# Altium PCB ASP LEDBoard.PcbDoc
Units mm, origin at the board's own origin, x right, y up, seen from the top; angles counter-clockwise.
Board outline 80 x 35 mm, 2 copper layers (Top Layer, Bottom Layer); 63 components, 34 nets, 190 pads, 13 vias.
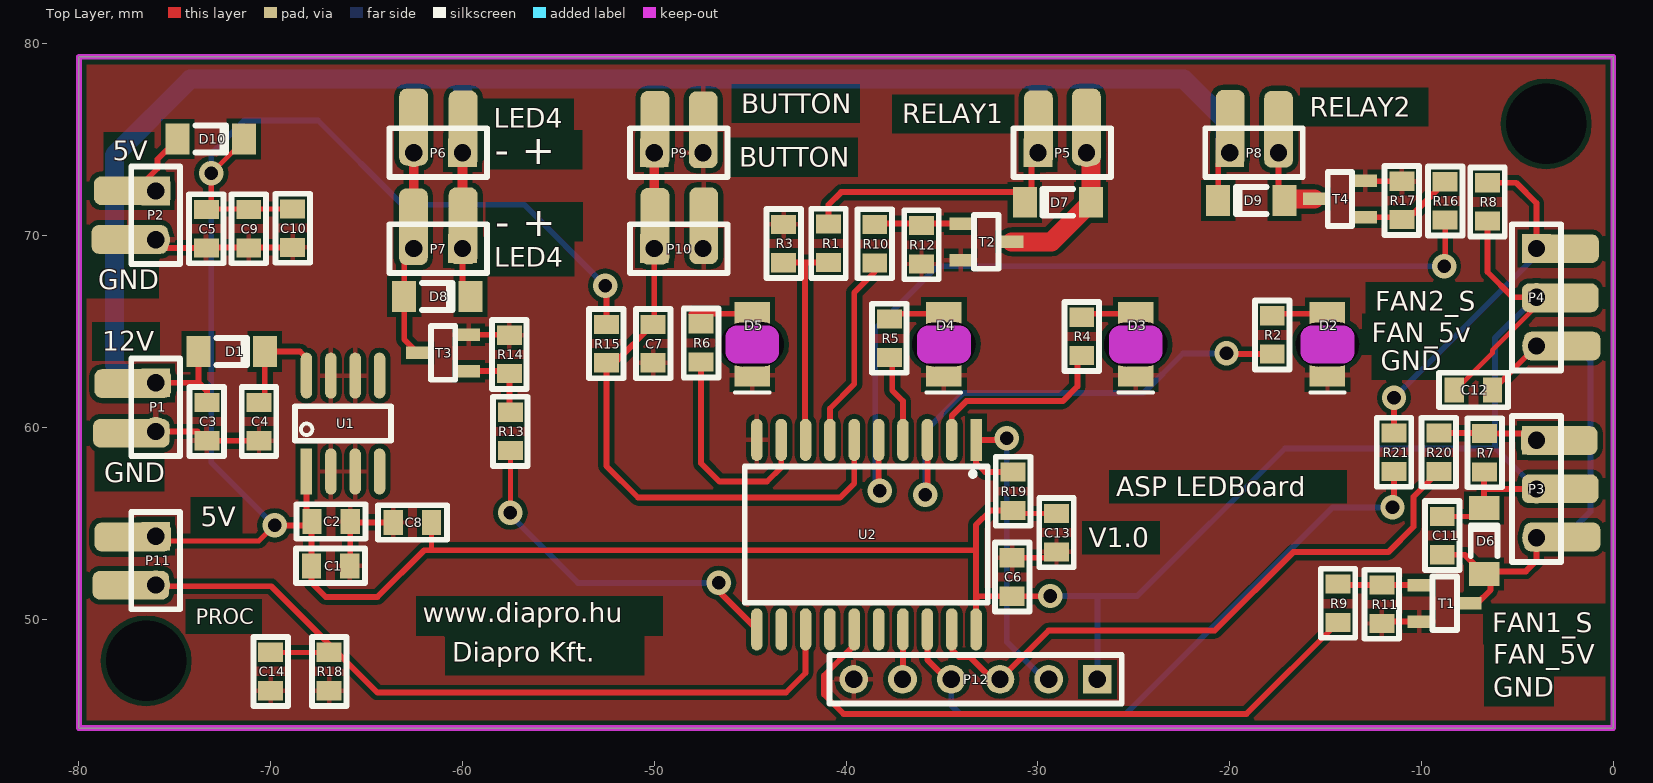
[diagram p0: Top Layer view]
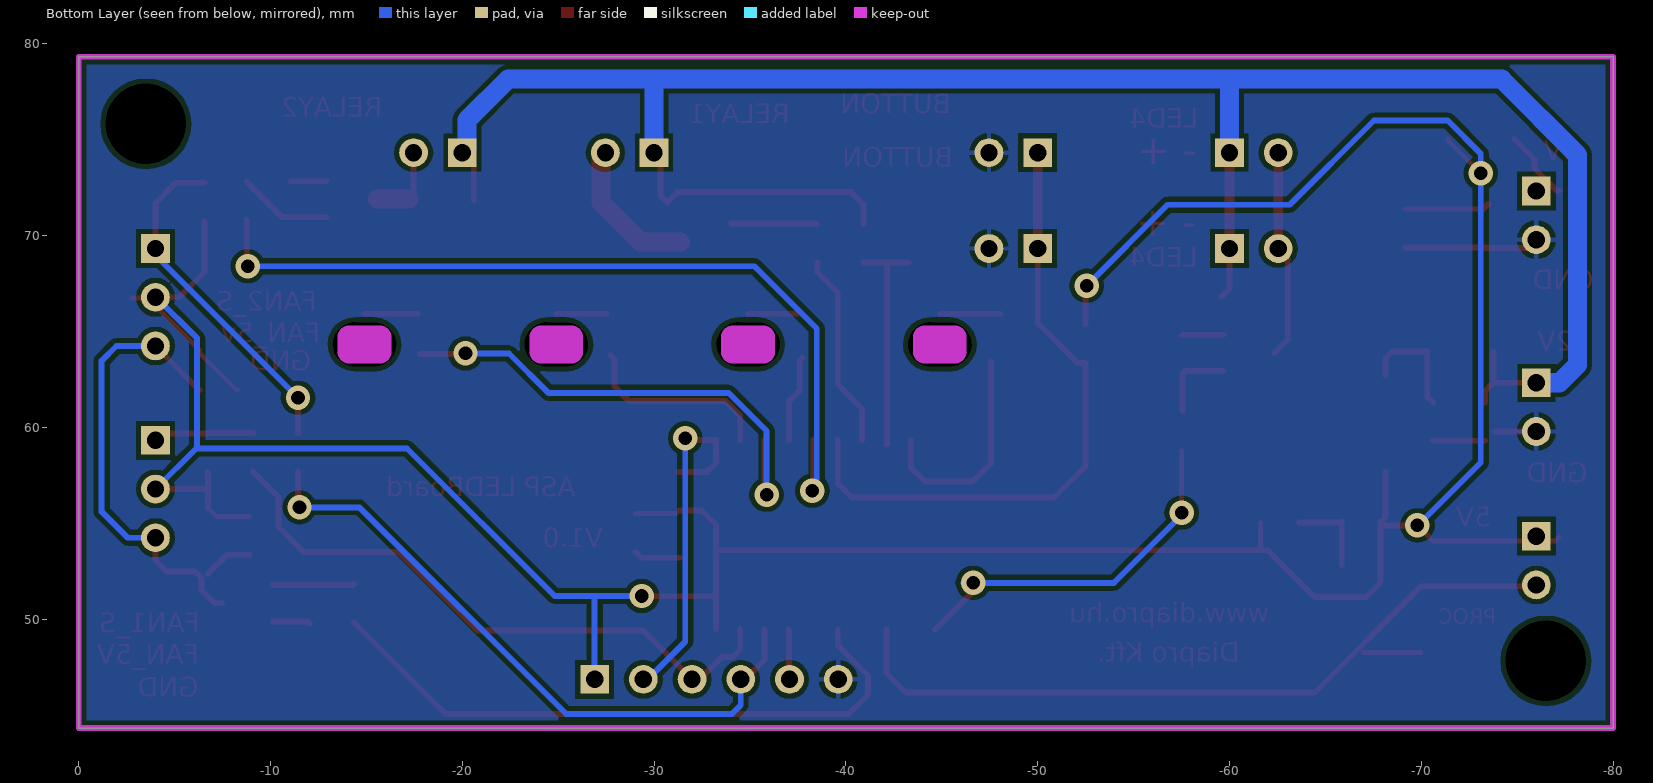
[diagram p1: Bottom Layer view, seen from below]
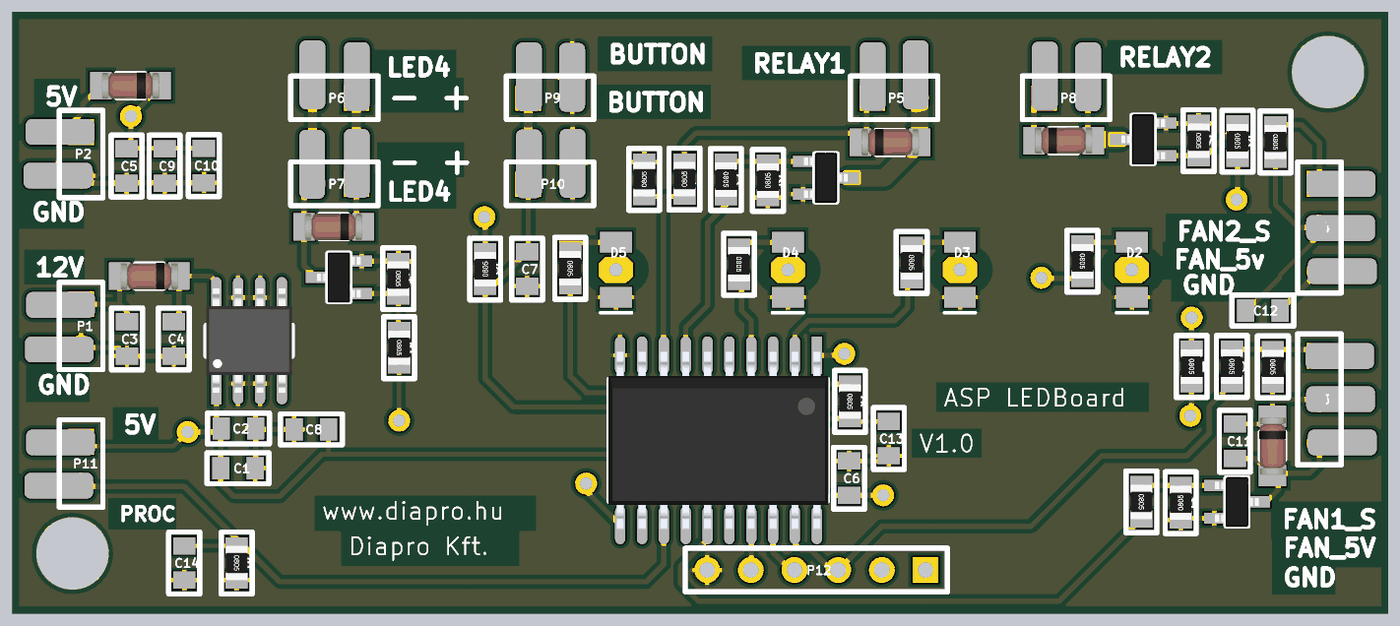
[diagram p2: 3D render of the assembled board from above, using the file's embedded part models]

## Layer stack, top to bottom
Top Layer: signal copper 0.0356
Dielectric: dielectric 0.32, FR-4, Dk 4.8
Bottom Layer: signal copper 0.0356

## Board outline
-80,44.323 -80,79.323 0,79.323 0,44.323

## Design rules (kind name [scope] priority, off if disabled: settings)
Clearance [All] p1: gap=0.254
PolygonConnect [All] p1: connectstyle=Relief reliefconductorwidth=0.254 reliefentries=4 polygonreliefangle="90 Angle"
RoutingVias [All] p1: holewidth=0.711 width=1.27 viastyle="Through Hole" minholewidth=0.711 minwidth=1.27 maxholewidth=0.711 maxwidth=1.27
SilkscreenOverComponentPads [All] p1: minsilkscreentomaskgap=0.254
SolderMaskExpansion [All] p1: expansion=0.102
Width [All] p1: maxlimit=1.524 minlimit=0.254 preferedwidth=0.254
27 further rules are at their usual default settings.

## Components (designator, comment, footprint, x,y, rotation, side; value= is the part's Value field where it differs from the comment)
C1 "10uF" FP_0805_CAP_085 -66.878,52.781 r180 top
C2 "10uF" FP_0805_CAP_085 -66.853,55.093 r180 top
C3 "10uF" FP_0805_CAP_085 -73.33,60.3 r90 top
C4 "10uF" FP_0805_CAP_085 -70.612,60.3 r90 top
C5 "10uF" FP_0805_CAP_085 -73.355,70.358 r90 top
C6 "100nF" FP_0805_CAP_085 -31.344,52.197 r270 top
C7 "100nF" FP_0805_CAP_085 -50.063,64.364 r90 top
C8 "22uF" FP_0805_CAP_085 -62.611,55.042 r0 top
C9 "22uF" FP_0805_CAP_085 -71.145,70.358 r90 top
C10 "22uF" FP_0805_CAP_085 -68.859,70.383 r90 top
C11 "22uF" FP_0805_CAP_085 -8.915,54.356 r90 top
C12 "22uF" FP_0805_CAP_085 -7.29,61.951 r180 top
C13 "22uF" FP_0805_CAP_085 -29.032,54.508 r90 top
C14 "100nF" FP_0805_CAP_085 -70.002,47.269 r90 top
D1 "LL4150GS18" SOD-80 -72.161,63.957 r270 top
D2 "LED_RED" "1206 LED Reversed" -14.9,64.323 r90 top
D3 "LED_RED" "1206 LED Reversed" -24.9,64.323 r90 top
D4 "LED_RED" "1206 LED Reversed" -34.9,64.323 r90 top
D5 "LED_RED" "1206 LED Reversed" -44.9,64.323 r90 top
D6 "LL4150GS18" SOD-80 -6.731,53.95 r0 top
D7 "LL4150GS18" SOD-80 -28.829,71.73 r90 top
D8 "LL4150GS18" SOD-80 -61.443,66.827 r270 top
D9 "LL4150GS18" SOD-80 -18.745,71.831 r90 top
D10 "LL4150GS18" SOD-80 -73.254,75.032 r270 top
P1 "12V" HDR1X2 -76,62.323 r270 top
P2 "5V" HDR1X2 -76,72.323 r270 top
P3 "FAN2" HDR1X3 -4,59.323 r270 top
P4 "FAN1" HDR1X3 -4,69.323 r270 top
P5 "RELAY1" HDR1X2 -30,74.323 r0 top
P6 "LED4" HDR1X2 -60,74.323 r180 top
P7 "EXT_LED" HDR1X2 -60,69.323 r180 top
P8 "RELAY2" HDR1X2 -20,74.323 r0 top
P9 "BUTTON" HDR1X2 -50,74.323 r0 top
P10 "EXT_BUTTON" HDR1X2 -50,69.323 r0 top
P11 "PROC" HDR1X2 -76,54.323 r270 top
P12 "ISP" HDR1X6 -26.899,46.863 r180 top
R1 "8K2" FP_0805_RES -40.919,69.596 r90 top
R2 "470R" FP_0805_RES -17.78,64.821 r270 top
R3 "4K7" FP_0805_RES -43.256,69.583 r90 top
R4 "470R" FP_0805_RES -27.711,64.745 r270 top
R5 "470R" FP_0805_RES -37.744,64.643 r270 top
R6 "470R" FP_0805_RES -47.561,64.402 r270 top
R7 "1K" FP_0805_RES -6.706,58.674 r270 top
R8 "1K" FP_0805_RES -6.553,71.755 r270 top
R9 "470R" FP_0805_RES -14.351,50.825 r270 top
R10 "470R" FP_0805_RES -38.506,69.571 r270 top
R11 "10K" FP_0805_RES -12.065,50.775 r90 top
R12 "10K" FP_0805_RES -36.068,69.52 r90 top
R13 "470R" FP_0805_RES -57.506,59.792 r270 top
R14 "10K" FP_0805_RES -57.556,63.805 r270 top
R15 "1K" FP_0805_RES -52.502,64.364 r90 top
R16 "470R" FP_0805_RES -8.763,71.806 r270 top
R17 "10K" FP_0805_RES -11.024,71.831 r270 top
R18 "1K" FP_0805_RES -66.954,47.269 r270 top
R19 "10K" FP_0805_RES -31.293,56.667 r270 top
R20 "1K" FP_0805_RES -9.093,58.699 r270 top
R21 "1K" FP_0805_RES -11.43,58.699 r270 top
T1 "Si2306" FET_SOT23 -8.788,50.825 r180 top
T2 "Si2306" FET_SOT23 -32.69,69.672 r180 top
T3 "Si2306" FET_SOT23 -61.011,63.881 r0 top
T4 "Si2306" FET_SOT23 -14.249,71.907 r0 top
U1 "78L05" Supply_SOIC8 -66.23,60.198 r90 top
U2 "ATTiny2313" DIGITAL_SOIC20W -38.938,54.407 r0 top

## Footprints (in the part's own frame and the unit in brackets; to place one, negate y for a bottom-side part, rotate by r counter-clockwise, add the part's x,y. Pads: shape width x height; smd on the part's side, far side on the other; paste and mask are expansions set on the pad)
"1206 LED Reversed" [mm] "1206 Green LED"
  oct 1.524x2 hole 2.3 slot 3.3 at 90.7 deg unplated: 0(0,0)
  rect 1.2x1.85 smd: A(1.6,0) K(-1.6,0)
  Keep-Out Layer lines w1.2: -0.4,0.8 -0.4,-0.8 0.4,-0.8 0.4,0.8 -0.4,0.8
  silkscreen extent -2.5,-0.9 -2.5,0.9, body extent -1.6,-0.8 1.6,0.8, height 0.5
DIGITAL_SOIC20W [mm]
  rect 0.6x2.2 smd: 1(5.715,4.94)
  oval 0.6x2.2 smd: 2(4.445,4.94) 3(3.175,4.94) 4(1.905,4.94) 5(0.635,4.94) 6(-0.635,4.94) 7(-1.905,4.94) 8(-3.175,4.94) 9(-4.445,4.94) 10(-5.715,4.94) 11(-5.715,-4.94) 12(-4.445,-4.94) 13(-3.175,-4.94) 14(-1.905,-4.94) 15(-0.635,-4.94) 16(0.635,-4.94) 17(1.905,-4.94) 18(3.175,-4.94) 19(4.445,-4.94) 20(5.715,-4.94)
  silkscreen extent -6.35,-3.56 6.32,3.56, body extent -6.4,-5.15 6.4,5.15, height 2.7
FET_SOT23 [mm] "SOT23-3 tok"
  rect 1.2x0.65 smd: D(-1.327,0) G(1.327,-0.95) S(1.327,0.95)
  silkscreen extent -0.64,-1.4 0.64,1.4, body extent -1.27,-1.46 1.27,1.46, height 0.97
FP_0805_CAP_085 [mm] "0805 kapacitás YAGEO 0.85mm magas"
  rect 1x1.3 smd: 1(-1,0) 2(1,0)
  silkscreen extent -1.8,-0.9 1.8,0.9, body extent -1,-0.64 1.03,0.64, height 0.85
FP_0805_RES [mm] "0805 ellenállás"
  rect 1x1.3 smd: 1(-1,0) 2(1,0)
  silkscreen extent -1.8,-0.9 1.8,0.9, body extent -1,-0.62 1,0.63, height 0.62
HDR1X2 [mm] "Connector; Header; 2 Position"
  rect 1.5x1.5 hole 0.9: 1(0,0)
  round 1.5 hole 0.9: 2(2.54,0)
  silkscreen extent -1.27,-1.27 3.81,1.27
HDR1X3 [mm] "Connector; Header; 3 Position"
  rect 1.5x1.5 hole 0.9: 1(0,0)
  round 1.5 hole 0.9: 2(2.54,0) 3(5.08,0)
  silkscreen extent -1.27,-1.27 6.35,1.27
HDR1X6 [mm] "Connector; Header; 6 Position"
  rect 1.5x1.5 hole 0.9: 1(0,0)
  round 1.5 hole 0.9: 2(2.54,0) 3(5.08,0) 4(7.62,0) 5(10.16,0) 6(12.7,0)
  silkscreen extent -1.27,-1.27 13.97,1.27
SOD-80 [mm]
  rect 1.6x1.25 smd: A(0,-1.598) K(0,1.852)
  silkscreen extent -0.7,-0.67 0.7,0.93, body extent -0.76,-1.55 0.78,1.8
Supply_SOIC8 [mm]
  rect 2.4x0.6 smd: 1(-2.5,1.905)
  oval 2.4x0.6 smd: 2(-2.5,0.635) 3(-2.5,-0.635) 4(-2.5,-1.905) 5(2.5,-1.905) 6(2.5,-0.635) 7(2.5,0.635) 8(2.5,1.905)
  silkscreen extent -0.9,-2.5 0.9,2.5, body extent -3.03,-2.5 3.03,2.5, height 1.9

## Part data
C1 C2 C3 C4 C5 C6 C7 C8 C9 C10 C11 C12 C13 C14: library part CAP, "Capacitor"
D1 D6 D7 D8 D9 D10: library part DIODE_big
D2 D3 D4 D5: library part LED_R, "Typical LED"
P1 P2 P5 P6 P7 P8 P9 P10 P11: library part "Header 2", "Header, 2-Pin"
P3 P4: library part "Header 3", "Header, 3-Pin"
P12: library part "Header 6", "Header, 6-Pin"
R1 R2 R3 R4 R5 R6 R7 R8 R9 R10 R11 R12 R13 R14 R15 R16 R17 R18 R19 R20 R21: library part RES, "Resistor"
T1 T2 T3 T4: library part NMOS
U1: library part 78Lxx_SOIC

## Free pads (board coordinates)
  rrect50% 4x1.5 smd: 0(-77.343,69.799) 0(-77.292,51.765) 0(-77.267,59.69) 0(-77.216,72.339) 0(-77.191,54.28) 0(-77.191,62.281) 0(-2.819,59.309) 0(-2.769,56.794) 0(-2.769,66.751) 0(-2.743,69.317) 0(-2.667,54.28) 0(-2.667,64.237)
  round 1.524 hole 4.2: 0(-76.5,47.823) 0(-3.5,75.823)
  rrect50% 1.5x4 smd: 0(-62.56,70.46) 0(-62.55,75.657) 0(-59.969,70.51) 0(-59.969,75.565) 0(-49.962,70.485) 0(-49.962,75.54) 0(-47.447,75.514) 0(-47.422,70.51) 0(-29.972,75.565) 0(-27.47,75.657) 0(-19.964,75.59) 0(-17.45,75.54)

## Via types
v1: diameter 1.27, hole 0.711, Top Layer to Bottom Layer, 13 vias

## Nets (pads, with @x,y where several pads share a name; then routed paths per layer and width w, separated by ;. In a path a pad name is that pad's centre, name@x,y a point inside that pad or via, vN(x,y) a via of type N, cw(c..) or ccw(c..) an arc to the next point about the centre after c; other vN are vias at no path point)
5V: C1.2 C2.2 C5.2 C6.2 C8.2 C9.2 C10.2 C11.2 C12.2 C13.2 D6.K D10.K P3.2 P4.2 P11.1 P12.1 pad.0@-2.769,56.794 pad.0@-2.769,66.751 pad.0@-77.191,54.28 R7.2 R8.2 R15.2 R19.2 U1.1 U2.20 | length 186.3
  Top Layer w0.254: pad.0@-77.191,54.28 -76.987,54.077 -70.612,54.077 v1(-69.799,54.889) ; C5.2@-73.177,71.383 C10.2@-69.164,71.383 ; v1(-73.101,73.254) -71.402,74.953 D10.K ; C8.2 -61.611,53.635 -61.57,53.594 ; R19.2@-31.134,55.508 C13.2 ; C11.2 -7.177,55.356 D6.K ; C12.2 -8.209,61.951 -6.299,63.861 -6.299,64.019 -3.567,66.751 pad.0@-2.769,66.751
  Top Layer w0.305: C5.2@-73.498,71.653 -73.203,71.358 -73.177,71.383 -73.101,71.46 v1(-73.101,73.254) ; v1(-69.799,54.889) -68.056,54.889 C2.2@-67.878,55.067 ; U1.1 -68.135,55.324 C2.2@-67.878,55.067 ; C2.2 C2.2@-67.878,55.067 ; R15.2 v1@-52.502,67.335 ; U2.20 -33.223,51.054 ; R19.2 -32.471,55.667 -33.223,54.915 -33.223,53.594 ; v1@-29.372,51.197 C6.2 -33.08,51.197 -33.223,51.054 ; D6.K -6.731,56.899 ; R7.2 -6.731,57.649 -6.731,56.899 ; R8.2 -6.553,68.099 -5.237,66.783 P4.2 ; P3.2 -6.615,56.783 -6.731,56.899 ; C2.2@-67.878,55.067 C1.2 -67.878,51.902 -67.132,51.156 -64.44,51.156 -62.001,53.594 -61.57,53.594 -33.223,53.594 ; -33.223,51.054 -33.223,53.594
  Bottom Layer w0.305: v1@-69.825,54.889 -73.101,58.166 v1(-73.101,73.254) -73.101,74.27 -71.374,75.997 -67.539,75.997 -63.144,71.603 -56.769,71.603 v1(-52.553,67.386) ; v1(-29.362,51.206) -26.899,51.206 ; P12.1 -26.899,51.206 ; P3.2 -6.12,58.903 ; P4.2 -4.032,66.783 -6.172,64.643 -6.172,58.955 -6.12,58.903 ; -26.899,51.206 -24.816,51.206 -17.12,58.903 -6.12,58.903
12V: C3.2 D1.A D7.K D8.K D9.K P1.1 P5.1 P6.1 P7.1 P8.1 pad.0@-19.964,75.59 pad.0@-29.972,75.565 pad.0@-59.969,70.51 pad.0@-59.969,75.565 pad.0@-77.191,62.281 R1.2 | length 113.5
  Top Layer w0.305: P1.1 -73.759,62.323 ; D1.A -73.759,62.323 ; C3.2 -73.33,61.893 -73.759,62.323 ; P7.1 -60,67.237 D8.K ; R1.2 -40.919,71.603 -40.259,72.263 -31.214,72.263 D7.K -30.328,72.083 -30.328,73.995 P5.1 ; D9.K -20.597,73.726 P8.1
  Top Layer w0.508: P7.1 P6.1
  Bottom Layer w1: P1.1 -77.207,62.323 -78.147,63.263 -78.147,74.202 -74.193,78.156 -59.893,78.156 ; P6.1 -60,78.049 -59.893,78.156 ; P5.1 -30,78.108 -30.048,78.156 ; P8.1 -20.244,74.567 -20.244,76.022 -22.377,78.156 -30.048,78.156 ; -59.893,78.156 -30.048,78.156
12V_MODE: R1.1 R3.1 U2.8 | length 13
  Top Layer w0.305: R3.1 -43.243,68.596 R1.1 -42.097,68.596 -42.139,68.555 U2.8@-42.139,59.131
BUTTON: C7.2 P9.1 P10.1 pad.0@-49.962,70.485 pad.0@-49.962,75.54 R15.1 U2.6 | length 33.8
  Top Layer w0.305: P10.1 -50,65.427 C7.2 -52.063,63.364 R15.1 -52.502,57.988 -50.851,56.337 -40.31,56.337 -39.573,57.074 U2.6
  Top Layer w0.508: P10.1 P9.1
FAN_OUT_1: P3.1 pad.0@-2.819,59.309 R7.1 R20.1 | length 5.2
  Top Layer w0.305: R20.1 -6.731,59.699 R7.1 -4.351,59.674 P3.1
FAN_OUT_2: P4.1 pad.0@-2.743,69.317 R8.1 R21.1 | length 18.1
  Top Layer w0.305: R21.1 v1(-11.43,61.544) ; R8.1 -5.064,72.755 -4,71.691 P4.1
  Bottom Layer w0.305: v1(-11.43,61.544) -4,68.974 P4.1
GND: C1.1 C2.1 C3.1 C4.1 C5.1 C6.1 C7.1 C8.1 C9.1 C10.1 C13.1 C14.1 D2.K D3.K D4.K D5.K P1.2 P2.2 P9.2 P10.2 P12.6 pad.0@-47.422,70.51 pad.0@-47.447,75.514 pad.0@-77.267,59.69 pad.0@-77.343,69.799 R3.2 R11.1 R12.1 R14.1 R17.1 R18.2 T1.S T2.S T3.S T4.S U1.2 U1.3 U1.6 U1.7 U2.10 | length 25.1
  Top Layer w0.305: P1.2 C3.1@-73.813,59.783 ; P2.2 -75.575,69.358 -73.431,69.358 C5.1@-73.203,69.358 ; C5.1@-73.406,69.383 C10.1@-69.164,69.383 ; C3.1 C4.1 ; C1.1@-65.853,52.807 C2.1 -65.802,55.042 C8.1 ; T3.S -57.583,64.831 R14.1 ; C6.1 -29.344,53.197 C13.1 ; T4.S -12.896,72.831 R17.1 ; R11.1 -11.964,49.875 T1.S
LED0: R2.2 U2.3 | length 25.8
  Top Layer w0.305: v1(-35.865,56.49) -35.763,56.591 U2.3 ; v1@-19.999,63.821 R2.2
  Bottom Layer w0.305: v1@-35.865,56.464 v1(-35.865,56.49) -35.865,59.817 -33.884,61.798 -24.486,61.798 -22.429,63.856 v1(-20.168,63.856)
LED1: R4.2 U2.2 | length 10.2
  Top Layer w0.305: U2.2 -34.493,60.604 -33.731,61.366 -28.702,61.366 -27.94,62.128 -27.94,63.516 R4.2
LED2: R5.2 U2.4 | length 4.6
  Top Layer w0.305: R5.2 -37.592,63.491 -37.592,61.925 -37.033,61.366 U2.4
LED3: R6.2 U2.9 | length 11.6
  Top Layer w0.305: R6.2 -47.561,61.354 -47.561,58.128 -46.609,57.175 -44.12,57.175 -43.383,57.912 U2.9
LED4: R13.2 U2.11 | length 19.4
  Top Layer w0.254: v1(-57.506,55.55) R13.2
  Top Layer w0.305: v1(-46.634,51.892) -46.634,51.448 U2.11
  Bottom Layer w0.305: v1@-57.569,55.486 -53.975,51.892 v1(-46.634,51.892) v1@-46.126,51.892
MISO: P12.4 R21.2 U2.18 | length 34.3
  Top Layer w0.305: U2.18 -35.763,47.879 P12.4@-34.519,46.634 ; v1@-11.43,55.804 R21.2
  Bottom Layer w0.305: P12.4 -34.519,45.517 -34.061,45.06 -25.4,45.06 -14.63,55.829 v1(-11.506,55.829)
MOSI: P12.5 U2.17 | length 2.8
  Top Layer w0.305: P12.5@-37.059,46.634 -37.033,46.66 U2.17
NetC4_2: C4.2 D1.K U1.8 | length 6
  Top Layer w0.305: C4.2 -70.309,61.602 D1.K -68.478,63.957 -68.135,63.614 U1.8
NetC11_1: C11.1 C12.1 D6.A P3.3 P4.3 pad.0@-2.667,54.28 pad.0@-2.667,64.237 T1.D | length 27.5
  Top Layer w0.305: C11.1 -7.735,53.356 D6.A ; T1.D -7.087,50.825 -6.401,51.511 -6.401,52.146 -6.054,52.493 -4.556,52.493 -4,53.048 P3.3 ; C12.1 -4.004,64.237 pad.0@-2.667,64.237
  Bottom Layer w0.305: P3.3 -2.551,54.243 -1.194,55.601 -1.194,63.475 -1.962,64.243 P4.3
NetD2_A: D2.A R2.1 | length 2.8
  Top Layer w0.305: R2.1@-17.678,65.923 D2.A
NetD3_A: D3.A R4.1 | length 2.6
  Top Layer w0.305: R4.1@-27.533,65.923 D3.A
NetD4_A: D4.A R5.1 | length 2.6
  Top Layer w0.305: R5.1@-37.464,65.923 D4.A
NetD5_A: D5.A R6.1 | length 3.2
  Top Layer w0.305: -48.057,65.923 D5.A
NetD7_A: D7.A P5.2 pad.0@-27.47,75.657 T2.D | length 7.7
  Top Layer w0.305: P5.2 pad.0@-27.231,74.094
  Top Layer w1: T2.D -29.288,69.672 D7.A pad.0@-27.231,74.094
NetD8_A: D8.A P6.2 P7.2 pad.0@-62.55,75.657 pad.0@-62.56,70.46 T3.D | length 10.9
  Top Layer w0.305: P7.2 -63.041,68.822 D8.A -63.041,64.584 T3.D
  Top Layer w0.508: P7.2 P6.2
NetD9_A: D9.A P8.2 pad.0@-17.45,75.54 T4.D | length 4.2
  Top Layer w0.305: P8.2 -17.46,72.144 D9.A@-17.223,71.907
  Top Layer w1: D9.A@-17.223,71.907 T4.D
NetD10_A: D10.A P2.1 pad.0@-77.216,72.339 | length 3.8
  Top Layer w0.305: pad.0@-77.216,72.339 -77.058,72.339 -75.905,73.492 -75.905,73.978 D10.A
NetR9_1: R9.1 R11.2 T1.G | length 4.3
  Top Layer w0.305: R9.1 -14.301,51.775 T1.G
NetR10_1: R10.1 R12.2 T2.G | length 4.5
  Top Layer w0.305: R10.1 -38.455,70.622 T2.G
NetR13_1: R13.1 R14.2 T3.G | length 4.1
  Top Layer w0.305: T3.G -57.683,62.931 R14.2 R13.1@-57.556,60.842
NetR16_1: R16.1 R17.2 T4.G | length 4.9
  Top Layer w0.305: T4.G -10.611,70.957 R16.1
PROC_SIGNAL: C14.2 P11.2 pad.0@-77.292,51.765 R18.1 U2.13 | length 41.9
  Top Layer w0.254: C14.2 R18.1
  Top Layer w0.305: pad.0@-76,51.714 -69.977,51.714 -64.44,46.177 -43.129,46.177 -42.113,47.193 U2.13
PWM: R9.2 U2.15 | length 33.2
  Top Layer w0.305: U2.15 -39.573,48.641 -41.148,47.066 -41.148,46.076 -40.132,45.06 -19.117,45.06 R9.2
RELAY1: R10.2 U2.7 | length 10.2
  Top Layer w0.305: U2.7 -40.843,60.985 -39.573,62.255 -39.573,67.031 -38.506,68.097 R10.2
RELAY2: R16.2 U2.5 | length 44.4
  Top Layer w0.305: U2.5 -38.303,56.744 v1(-38.252,56.693) ; v1@-8.763,68.58 R16.2
  Bottom Layer w0.305: v1@-38.481,56.617 -38.481,65.151 -35.23,68.402 v1(-8.814,68.402)
RESET: P12.2 R19.1 U2.1 | length 18.7
  Top Layer w0.305: v1(-31.623,59.436) -31.712,59.347 U2.1 -33.223,58.141 -32.75,57.667 R19.1
  Bottom Layer w0.305: v1(-31.623,59.436) -31.623,48.819 P12.2@-29.439,46.634
SCK: P12.3 R20.2 U2.19 | length 32.7
  Top Layer w0.305: U2.19 -34.493,48.412 -34.112,48.031 -33.553,48.031 -32.385,46.863 P12.3 -29.439,49.403 -20.777,49.403 -16.688,53.492 -11.735,53.492 -10.414,54.813 -10.414,56.379 R20.2 ; P12.3@-32.131,46.787 P12.3@-31.979,46.634
pads on no net: D2.0 D3.0 D4.0 D5.0 U1.4 U1.5 U2.12 U2.14 U2.16

## Polygon pours and split planes (outlines as drawn)
GND on Bottom Layer "Top Layer-No Net" (solid, pour order 4): -80,79.323 0,79.323 0,44.323 -79.883,44.323
GND on Top Layer "Top Layer-No Net" (solid, pour order 5): -80,79.323 0,79.323 0,44.323 -79.883,44.323

## Keep-outs
Keep-Out Layer:
  the board outline again, w0.305

## Other copper
Top Layer:
  text "BUTTON" at -45.466,76.378 h1
  text "RELAY2" at -15.824,76.2 h1
  text "RELAY1" at -37.084,75.844 h1
  text "LED4" at -58.369,75.616 h1
  text "5V" at -78.232,73.914 h1
  text "- +" at -58.318,73.711 h1.52
  text "BUTTON" at -45.568,73.584 h1
  text "- +" at -58.293,69.952 h1.52
  text "LED4" at -58.344,68.377 h1
  text "GND" at -78.994,67.208 h1
  text "FAN2_S" at -12.421,66.074 h1
  text "FAN_5v" at -12.598,64.44 h1
  text "12V" at -78.791,63.983 h1
  text "GND" at -12.116,62.967 h1
  text "GND" at -78.689,57.15 h1
  text "ASP LEDBoard" at -25.917,56.406 h1
  text "5V" at -73.66,54.839 h1
  text "V1.0" at -27.339,53.739 h1
  text "www.diapro.hu" at -62.07,49.83 h1
  text "PROC" at -73.914,49.733 h0.8
  text "FAN1_S" at -6.299,49.327 h1
  text "Diapro Kft." at -60.537,47.77 h1
  text "FAN_5V" at -6.248,47.676 h1
  text "GND" at -6.248,45.949 h1

## Silkscreen, mask and mechanical layers (free items; w line width, h text height)
Top Overlay:
  text "BUTTON" at -45.466,76.378 h1
  text "RELAY2" at -15.824,76.2 h1
  text "RELAY1" at -37.084,75.844 h1
  text "LED4" at -58.369,75.616 h1
  text "5V" at -78.232,73.914 h1
  text "- +" at -58.318,73.711 h1.52
  text "BUTTON" at -45.568,73.584 h1
  text "- +" at -58.293,69.952 h1.52
  text "LED4" at -58.344,68.377 h1
  text "GND" at -78.994,67.208 h1
  text "FAN2_S" at -12.421,66.074 h1
  text "FAN_5v" at -12.598,64.44 h1
  text "12V" at -78.791,63.983 h1
  text "GND" at -12.116,62.967 h1
  text "GND" at -78.689,57.15 h1
  text "ASP LEDBoard" at -25.917,56.406 h1
  text "5V" at -73.66,54.839 h1
  text "V1.0" at -27.339,53.739 h1
  text "www.diapro.hu" at -62.07,49.83 h1
  text "PROC" at -73.914,49.733 h0.8
  text "FAN1_S" at -6.299,49.327 h1
  text "Diapro Kft." at -60.537,47.77 h1
  text "FAN_5V" at -6.248,47.676 h1
  text "GND" at -6.248,45.949 h1